# EAGLE board BOSS-RoboClaw-Interface - Copy (EAGLE 9.6.2)
Basic Micro 2x7A RoboClaw interface to PI M-227.10 motor mikel.

Size 41.45 x 48.29 mm. Coordinates in mm from the lower left corner, seen from the top.
Outline: 0,0 41.45,0 41.45,48.28 0,48.28 0,0
Copper layers (1*16): Top 0.035559375mm / dielectric 1.6mm / Bottom 0.035559375mm
Design rules "oshpark-2layer": minimum track width 6mil, minimum drill 10mil, track to track 6mil, track to pad 6mil, pad to pad 6mil, via to via 6mil, smd to smd 6mil, copper to edge 15mil, drill to drill 6mil, minimum pad ring 5mil, minimum via ring 5mil, stop-mask expansion 2.5mil, vias tented up to drill 0mil, thermal gap 10mil
Holes 2.9 mm at 2.49,2.87 2.49,45.42 38.94,45.42 38.94,2.87

## Footprints (pad centres in the part's own frame; a part is rotated, then mirrored left to right if it is on the bottom)
C0805 = smd 1.3 x 1.5: 1 -0.95,0; 2 0.95,0
SO-08 = smd 0.6 x 2.2: 1 -1.905,-2.6; 2 -0.635,-2.6; 3 0.635,-2.6; 4 1.905,-2.6; 5 1.905,2.6; 6 0.635,2.6; 7 -0.635,2.6; 8 -1.905,2.6
2X02-SHROUD = drill 1.016 octagon: 1 -1.27,-1.27; 2 -1.27,1.27; 3 1.27,-1.27; 4 1.27,1.27
1X02-MOLEX-22112022 = drill 1.016 square: 1 0,0 | drill 1.016: 2 2.54,0
1X03RA-MOLEX-22122034 = drill 1.016 square: 1 -2.54,3.81 | drill 1.016: 2 0,3.81; 3 2.54,3.81
FE10-2-SAMTEC-ESW-110-44-S-D = drill 0.914 square: 1 -11.43,1.27 | drill 0.914 octagon: 2 -11.43,-1.27; 3 -8.89,1.27; 4 -8.89,-1.27; 5 -6.35,1.27; 6 -6.35,-1.27; 7 -3.81,1.27; 8 -3.81,-1.27; 9 -1.27,1.27; 10 -1.27,-1.27; 11 1.27,1.27; 12 1.27,-1.27; 13 3.81,1.27; 14 3.81,-1.27; 15 6.35,1.27; 16 6.35,-1.27; 17 8.89,1.27; 18 8.89,-1.27; 19 11.43,1.27; 20 11.43,-1.27
H2R15ST = drill 1.092: 1 9.69,1.422; 2 6.921,1.422; 3 4.153,1.422; 4 1.384,1.422; 5 -1.384,1.422; 6 -4.153,1.422; 7 -6.921,1.422; 8 -9.69,1.422; 9 8.306,-1.422; 10 5.537,-1.422; 11 2.769,-1.422; 12 0,-1.422; 13 -2.769,-1.422; 14 -5.537,-1.422; 15 -8.306,-1.422 | hole 3.1: -16.662,0; 16.662,0

## Placement (x,y rotation side)
C1  0.1uF  [C0805]  20.32,27.94 90 bottom
C2  0.1uF  [C0805]  15.24,27.94 90 bottom
IC1  ISO7221A  [SO-08]  17.78,27.94 90 top
J1  [2X02-SHROUD]  5.08,30.48 90 top
J2  PINHD-1X2-MOLEX-22112022  [1X02-MOLEX-22112022]  27.94,27.94 90 top
J3  Molex 22122034  [1X03RA-MOLEX-22122034]  38.1,30.48 90 top
J4  [FE10-2-SAMTEC-ESW-110-44-S-D]  20.74,7.62 180 bottom
X1  Amphenol L77SDAH15SOL2RM8C309  [H2R15ST]  20.73,17.78 0 top

## Library data of the parts
C1 C2 = AUmlib; SPICEPREFIX: C
IC1 = AUmlib; MPN: ISO7221AD; OC_FARNELL: 1390651; OC_NEWARK: 48M0672
J1-J4 = AUmlib
X1 = AUmlib; OC_FARNELL: unknown; OC_NEWARK: unknown

## Nets
ENC1A: X1.14
ENC1B: X1.15
GND: C1.2 IC1.4 J3.3 X1.6
GND-ISO: C2.2 IC1.5 J1.4
LIMIT/HOME: J3.1 J3.2
M1A: J2.2 X1.9
M1B: J2.1 X1.2
N$1: IC1.7 J1.1
N$2: IC1.6 J1.3
RX: IC1.2
TX: IC1.3
VCC1: C1.1 IC1.1 X1.4
VCC2: C2.1 IC1.8 J1.2

## Tracks (layer width: path | path; a pad name or v marks a point on that pad's centre or on a via)
GND  (3 unrouted)
GND-ISO  (2 unrouted)
LIMIT/HOME  (1 unrouted)
M1A  (1 unrouted)
M1B  (1 unrouted)
N$1  (1 unrouted)
N$2  (1 unrouted)
VCC1  (2 unrouted)
VCC2  (2 unrouted)

## Text on the board
bPlace: 2019-03-01 BOSS Spectrograph / PI M-227.10 Motor to Basic Micro / RoboClaw2x7A Controller